# EAGLE board RH007.1 (EAGLE 7.1.0)
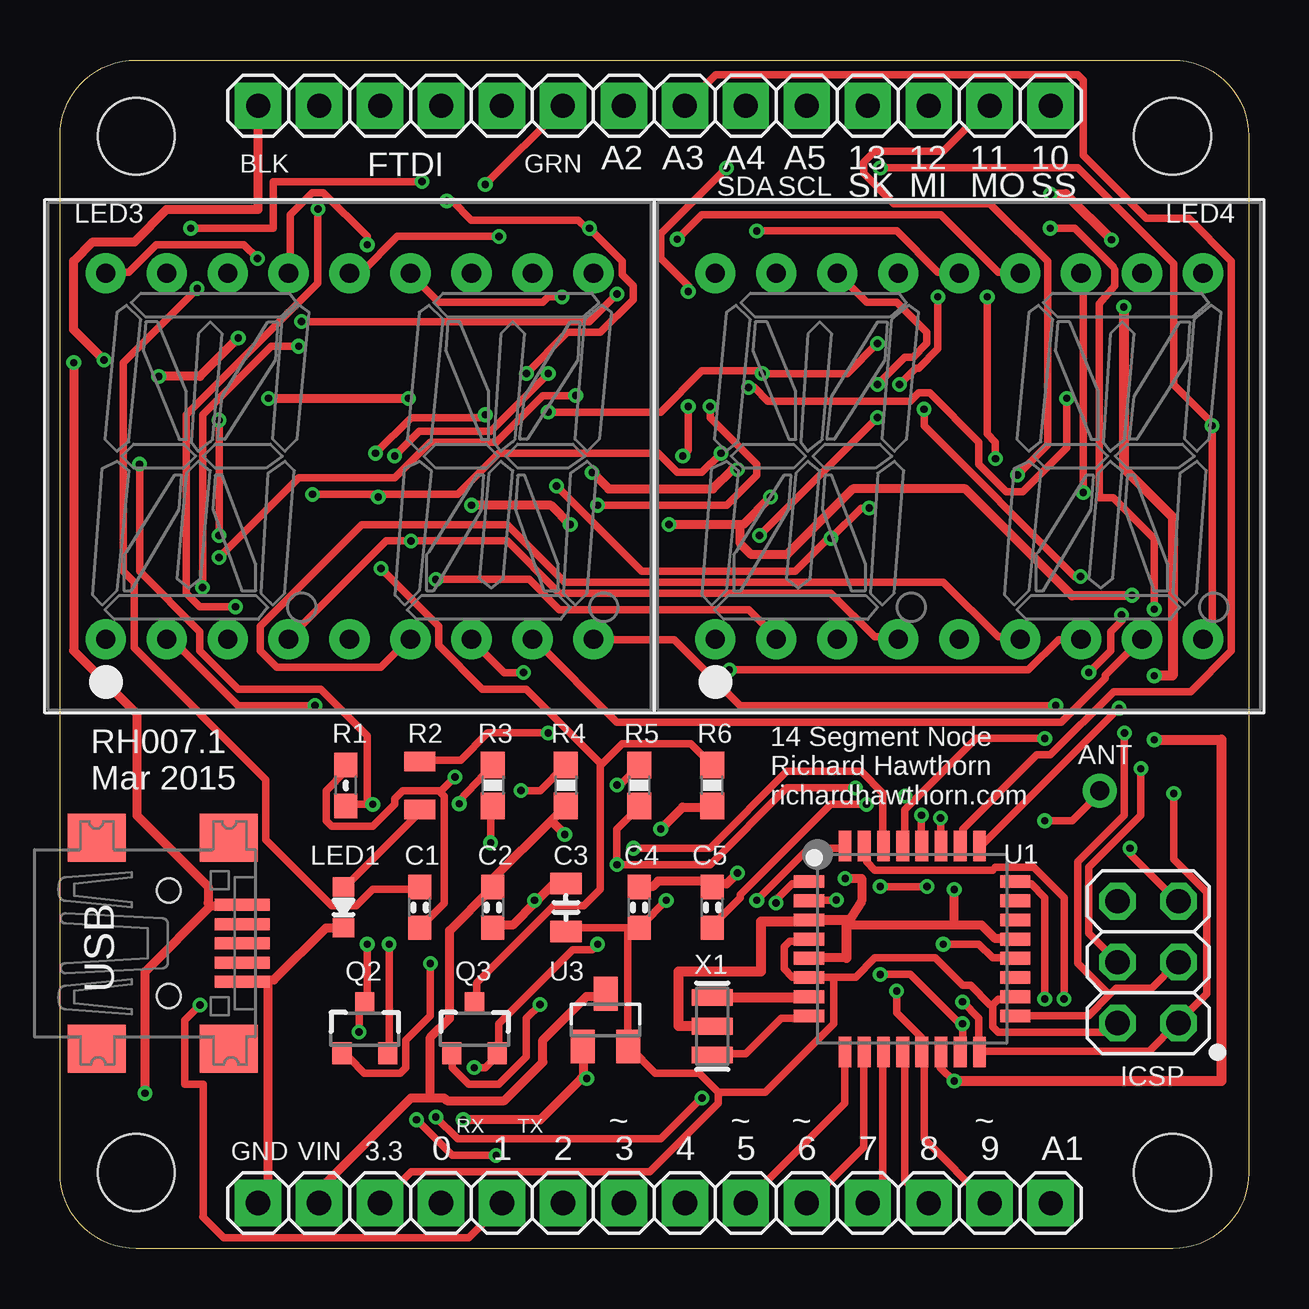
[diagram p0: board, top side]
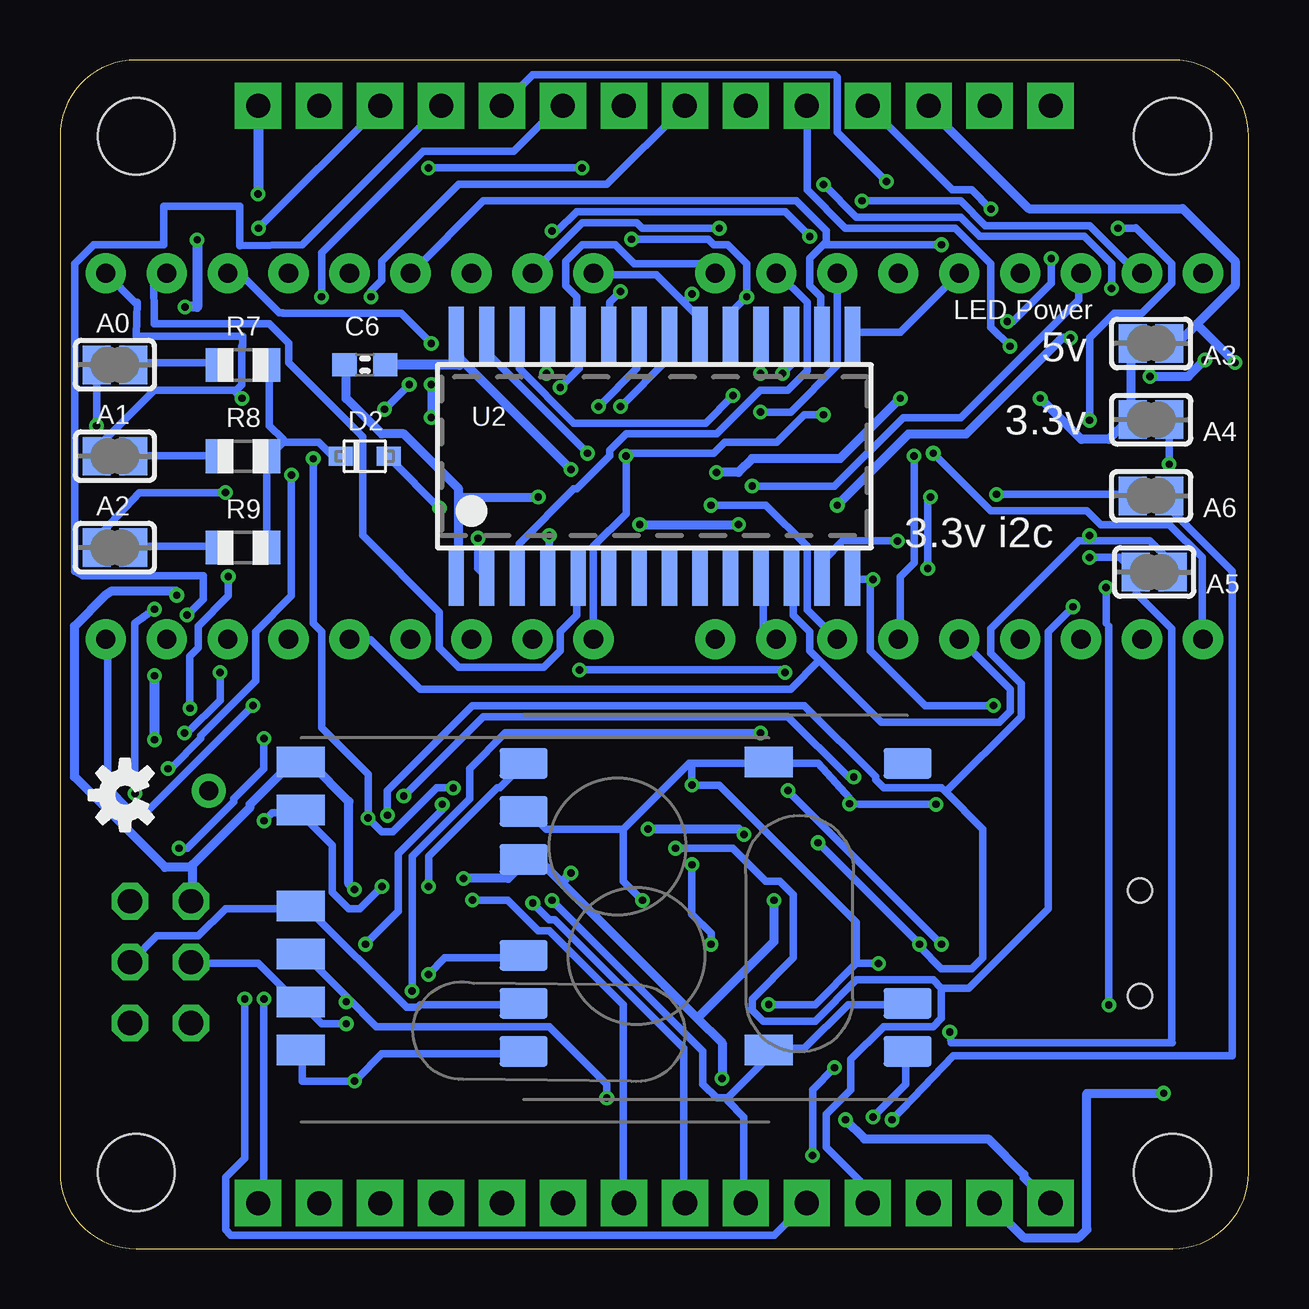
[diagram p1: board, bottom side, seen from below]

Size 49.53 x 49.53 mm. Coordinates in mm from the lower left corner, seen from the top.
Outline: 0,3.17 0,46.35 arc-90 3.17,49.53 46.35,49.53 arc-90 49.53,46.35 49.53,3.17 arc-90 46.35,0 3.17,0 arc-90 0,3.17
Copper layers (1*16): Top 0.035mm / dielectric 1.5mm / Bottom 0.035mm
Design rules "ITEADstudio_DRC *": minimum track width 12mil, minimum drill 12mil, track to track 6mil, track to pad 6mil, pad to pad 6mil, via to via 6mil, smd to smd 0mil, copper to edge 10mil, drill to drill 10mil, minimum pad ring 10mil, minimum via ring 6mil, stop-mask expansion 2mil, vias tented up to drill 100mil, thermal gap 15mil
Net classes: 1 power: width 0.381 mm, clearance 0.254 mm
Holes 3.2 mm at 3.17,3.17 46.35,3.17 3.17,46.35 46.35,46.35
tKeepout: area 0,0 to 5.7,5.7; area 43.8,0 to 49.5,5.7; area 43.8,43.8 to 49.5,49.5; area 0,43.8 to 5.7,49.5
bKeepout: area 0,43.8 to 5.7,49.5; area 43.8,43.8 to 49.5,49.5; area 43.8,0 to 49.5,5.7; area 0,0 to 5.7,5.7
tRestrict: area 24.3,8.9 to 29.1,12.8; area 5.8,16.9 to 6.9,18.5; area 5.2,9.7 to 6.7,10.4
bRestrict: area 27.4,17.7 to 29.2,18.7; area 21.1,13.8 to 22.9,14.9; area 21.6,12.6 to 22.1,13.2; area 20.7,12.6 to 21.2,13.2; area 20.2,12.8 to 20.7,13.5; area 20.1,13.4 to 20.6,14; area 26.5,18.9 to 27.1,19.5; area 26.5,17.9 to 27.1,18.5; area 27.5,19.1 to 28,19.8; area 27.9,18.8 to 29.1,19.6

## Footprints (pad centres in the part's own frame; a part is rotated, then mirrored left to right if it is on the bottom)
SOLDERJUMPER_REFLOW_NOPASTE = smd 1.168 x 1.6: 1 -0.762,0; 2 0.762,0
0603-CAP = smd 1.016 x 0.965: 1 -0.85,0; 2 0.85,0
0805-CAP = smd 0.902 x 1.3: 1 -1,0; 2 1,0
USB-MINIB = smd 0.5 x 2.308: D+ 0,4.064; D- -0.8,4.064; GND 1.6,4.064; ID 0.8,4.064; VBUS -1.6,4.064 | smd 2 x 2.4: GND1 -4.4,-2; GND2 -4.4,3.5; GND3 4.4,3.5; GND4 4.4,-2 | hole 1: -2.2,1; 2.2,1
1X06 = drill 1 pad 1.93 square: 1 -6.35,0; 2 -3.81,0; 3 -1.27,0; 4 1.27,0; 5 3.81,0; 6 6.35,0
SOD-323F = smd 1 x 0.8: A -1,0; C 1,0
2X03 = drill 1.016 octagon: 1 -2.54,-1.27; 2 -2.54,1.27; 3 0,-1.27; 4 0,1.27; 5 2.54,-1.27; 6 2.54,1.27
1X14 = drill 1 pad 1.93 square: 1 -16.51,0; 2 -13.97,0; 3 -11.43,0 | drill 1.016 pad 1.93 square: 4 -8.89,0; 5 -6.35,0; 6 -3.81,0; 7 -1.27,0; 8 1.27,0; 9 3.81,0; 10 6.35,0; 11 8.89,0; 12 11.43,0; 13 13.97,0; 14 16.51,0
1X08 = drill 1 pad 1.93 square: 1 -8.89,0; 2 -6.35,0; 3 -3.81,0; 4 -1.27,0; 5 1.27,0; 6 3.81,0; 7 6.35,0; 8 8.89,0
0603-LED = smd 0.8 x 0.9: MINUS -0.85,0; PLUS 0.85,0
SEGMENT_STARTBUST_DUAL_KWA-541CBB = drill 0.8 pad 1.676: 1 -10.16,-7.62; 2 -7.62,-7.62; 3 -5.08,-7.62; 4 -2.54,-7.62; 5 0,-7.62; 6 2.54,-7.62; 7 5.08,-7.62; 8 7.62,-7.62; 9 10.16,-7.62; 10 10.16,7.62; 11 7.62,7.62; 12 5.08,7.62; 13 2.54,7.62; 14 0,7.62; 15 -2.54,7.62; 16 -5.08,7.62; 17 -7.62,7.62; 18 -10.16,7.62
SOT23-3 = smd 0.8 x 0.9: 1 -0.95,-1; 2 0.95,-1; 3 0,1.1
0603-RES = smd 1.016 x 0.965: 1 -0.85,0; 2 0.85,0
0805 = smd 0.8 x 1.3: 1 -1,0; 2 1,0
0603-RES' = smd 1.1 x 1: 1 -0.85,0; 2 0.85,0
R0805 = smd 1.1 x 1.4: 1 -1,0; 2 1,0
RFM12B-MINPADS = smd 2 x 1.27: ANT 8,-6; GND 8,-2; IRQ -8,4; SCK 8,4; SDI 8,2; SDI1 -8.002,-6.001; SDO -8,6; SEL 8,6; VDD 8,-4
RFM69W-MINPADS = smd 2 x 1.27: ANA 8,-5; DIO0 -11.5,5; GND 8,-7; MISO 8,1; MOSI 8,3; NSS 8,5; SCK 8,-1; VDD -11.5,-7
TQFP32-08 = smd 1.27 x 0.533: 1 -4.293,2.8; 2 -4.293,2; 3 -4.293,1.2; 4 -4.293,0.4; 5 -4.293,-0.4; 6 -4.293,-1.2; 7 -4.293,-2; 8 -4.293,-2.8; 17 4.293,-2.8; 18 4.293,-2; 19 4.293,-1.2; 20 4.293,-0.4; 21 4.293,0.4; 22 4.293,1.2; 23 4.293,2; 24 4.293,2.8 | smd 0.533 x 1.27: 9 -2.8,-4.293; 10 -2,-4.293; 11 -1.2,-4.293; 12 -0.4,-4.293; 13 0.4,-4.293; 14 1.2,-4.293; 15 2,-4.293; 16 2.8,-4.293; 25 2.8,4.293; 26 2,4.293; 27 1.2,4.293; 28 0.4,4.293; 29 -0.4,4.293; 30 -1.2,4.293; 31 -2,4.293; 32 -2.8,4.293
SOP28_300MIL = smd 0.635 x 2.286: P$1 -8.255,-5.08; P$2 -6.985,-5.08; P$3 -5.715,-5.08; P$4 -4.445,-5.08; P$5 -3.175,-5.08; P$6 -1.905,-5.08; P$7 -0.635,-5.08; P$8 0.635,-5.08; P$9 1.905,-5.08; P$10 3.175,-5.08; P$11 4.445,-5.08; P$12 5.715,-5.08; P$13 6.985,-5.08; P$14 8.255,-5.08; P$15 8.255,5.08; P$16 6.985,5.08; P$17 5.715,5.08; P$18 4.445,5.08; P$19 3.175,5.08; P$20 1.905,5.08; P$21 0.635,5.08; P$22 -0.635,5.08; P$23 -1.905,5.08; P$24 -3.175,5.08; P$25 -4.445,5.08; P$26 -5.715,5.08; P$27 -6.985,5.08; P$28 -8.255,5.08
SOT23 = smd 1 x 1.4: 1 -0.95,-1.1; 2 0.95,-1.1; 3 0,1.1
RFM12B-ANTENNA = drill 0.8 pad 1.422: P$1 0,0
RESONATOR-SMD = smd 0.7 x 1.7: 1 -1.2,0; 2 0,0; 3 1.2,0

## Placement (x,y rotation side)
A0  [SOLDERJUMPER_REFLOW_NOPASTE]  47.24,36.83 180 bottom
A1  [SOLDERJUMPER_REFLOW_NOPASTE]  47.24,33.02 180 bottom
A2  [SOLDERJUMPER_REFLOW_NOPASTE]  47.24,29.21 180 bottom
A3  5V  [SOLDERJUMPER_REFLOW_NOPASTE]  4.06,37.72 0 bottom
A4  3.3V  [SOLDERJUMPER_REFLOW_NOPASTE]  4.06,34.54 0 bottom
A5  SCL  [SOLDERJUMPER_REFLOW_NOPASTE]  3.94,28.19 0 bottom
A6  SDA  [SOLDERJUMPER_REFLOW_NOPASTE]  4.06,31.37 0 bottom
C1  0.1  [0603-CAP]  14.99,14.22 90 top
C2  1u  [0603-CAP]  18.03,14.22 270 top
C3  10u  [0805-CAP]  21.08,14.22 90 top
C4  0.1  [0603-CAP]  24.13,14.22 90 top
C5  0.1  [0603-CAP]  27.18,14.22 90 top
C6  0.1  [0603-CAP]  36.83,36.83 180 bottom
CN1  USB  [USB-MINIB]  3.53,12.73 270 top
CN4  FTDI  [1X06]  14.61,47.62 0 top
D2  1N4148  [SOD-323F]  36.83,33.02 180 bottom
ICSP1  ICSP  [2X03]  45.34,11.94 90 top
JP3  [1X14]  24.77,1.91 180 top
JP5  [1X08]  32.38,47.62 0 top
LED1  LED0603  [0603-LED]  11.81,14.22 90 top
LED3  [SEGMENT_STARTBUST_DUAL_KWA-541CBB]  12.06,33.02 0 top
LED4  [SEGMENT_STARTBUST_DUAL_KWA-541CBB]  37.47,33.02 0 top
Q2  BSS138  [SOT23-3]  12.7,9.14 0 top
Q3  BSS138  [SOT23-3]  17.27,9.14 0 top
R1  10k  [0603-RES]  11.91,19.3 90 top
R2  1k5  [0805]  14.99,19.3 90 top
R3  10K  [0603-RES']  18.03,19.3 270 top
R4  10K  [0603-RES']  21.08,19.3 90 top
R5  10K  [0603-RES']  24.13,19.3 270 top
R6  10K  [0603-RES']  27.18,19.3 90 top
R7  47K  [R0805]  41.91,36.83 180 bottom
R8  47K  [R0805]  41.91,33.02 180 bottom
R9  47K  [R0805]  41.91,29.21 180 bottom
RF1  RFM12B  [RFM12B-MINPADS]  22.21,14.22 180 bottom
RF2  RFM69  [RFM69W-MINPADS]  31.5,13.28 180 bottom
U1  ATMega-328  [TQFP32-08]  35.51,12.5 0 top
U2  [SOP28_300MIL]  24.77,33.02 0 bottom
U3  MCP1703CB  [SOT23]  22.73,9.53 0 top
U$1  RFM12B_ANTENNA  [RFM12B-ANTENNA]  43.33,19.08 0 top
U$3  [OSHW-LOGO-S]  46.82,18.9 90 bottom
X1  16 MHz  [RESONATOR-SMD]  27.18,9.27 270 top

## Library data of the parts
A0 A1-A6 LED3 LED4 U2 = microbuilder
C1-C6 CN1 LED1 R1 R2 RF1 RF2 U1 U$1 = LowPowerLab
CN4 ICSP1 JP3 JP5 = pinhead
D2 R7-R9 = adafruit
Q2 Q3 R3-R6 X1 = SparkFun
U3 = linear
U$3 = SparkFun-Aesthetics

## Nets
3.3V: A4.2 C3.1 C4.1 ICSP1.2 JP3.12 Q2.1 Q3.1 R1.1 R3.1 R5.1 RF1.VDD RF2.VDD U1.4 U1.6 U1.18 U3.2
A0: U1.23
A1: JP3.1 U1.24
A2: JP5.1 U1.25
A3: JP5.2 U1.26
A4_SDA: A6.2 JP5.3 Q3.2 R5.2 U1.27
A5_SCL: A5.2 JP5.4 Q2.2 R3.2 U1.28
A6: U1.19
A7: U1.22
ADD0: A0.2 LED3.9 LED4.9 U2.P$23
ADD1: A1.2 LED3.10 LED4.10 U2.P$24
ADD2: A2.2 LED3.12 LED4.12 U2.P$25
AREF: C5.1 U1.20
COM: D2.A LED3.16 U2.P$2
COM1: LED3.11 U2.P$3
COM2: LED4.16 U2.P$4
COM3: LED4.11 U2.P$5
D0_RX: CN4.4 JP3.11 U1.30
D1_TX: CN4.5 JP3.10 U1.31
D2: JP3.9 RF1.IRQ RF2.DIO0 U1.32
D3: JP3.8 U1.1
D4: JP3.7 U1.2
D5: JP3.6 U1.9
D6: JP3.5 U1.10
D7: JP3.4 U1.11
D8: JP3.3 U1.12
D9: JP3.2 R2.2 U1.13
D10_SS: JP5.8 RF1.SEL RF2.NSS U1.14
D11_MOSI: ICSP1.4 JP5.7 RF1.SDI RF2.MOSI U1.15
D12_MISO: ICSP1.1 JP5.6 RF1.SDO RF2.MISO U1.16
D13_SCK: ICSP1.3 JP5.5 RF1.SCK RF2.SCK U1.17
GND [power]: C2.2 C3.2 C4.2 C5.2 C6.2 CN1.GND CN4.1 ICSP1.6 JP3.14 LED1.MINUS RF1.GND RF2.GND U1.3 U1.5 U1.21 U2.P$1 U3.1 X1.2
N$1: U1.7 X1.1
N$2: LED1.PLUS R2.1
N$3: RF1.ANT RF2.ANA U$1.P$1
N$5: A0.1 R7.2
N$17: D2.C R7.1 R8.1 R9.1
N$18: A2.1 R9.2
N$19: A1.1 R8.2
N$20: C1.2 CN4.6
N$21: U1.8 X1.3
N$22: LED3.7 LED4.7 U2.P$22
N$23: LED3.1 LED4.1 U2.P$21
N$24: LED3.18 LED4.18 U2.P$20
N$25: LED3.13 LED4.13 U2.P$19
N$26: LED3.6 LED4.6 U2.P$18
N$29: LED3.17 LED4.17 U2.P$17
N$30: LED3.15 LED4.15 U2.P$16
N$31: LED3.14 LED4.14 U2.P$15
N$32: LED3.2 LED4.2 U2.P$14
N$33: LED3.4 LED4.4 U2.P$13
N$34: LED3.5 LED4.5 U2.P$12
N$35: LED3.8 LED4.8 U2.P$11
RST: C1.1 ICSP1.5 R1.2 U1.29
SCL: A5.1 Q2.3 R4.2 U2.P$26
SDA: A6.1 Q3.3 R6.2 U2.P$27
VBUS [power]: A3.2 C2.1 CN1.VBUS CN4.3 JP3.13 R4.1 R6.1 U3.3
VLED [power]: A3.1 A4.1 C6.1 U2.P$28

## Tracks (layer width: path | path; a pad name or v marks a point on that pad's centre or on a via)
3.3V  (via drill 0.3)
  Top 0.305: R1.1 12,18.52 v13.03,18.52 12.8,18.63 12.8,21.37 10.86,23.32 7.43,23.32 5.83,24.92 5.83,25.72 3.31,28.23 v3.31,32.69 | U1.4 31.2,12.8 30.4,12.8 30.18,12.57 30.18,11.66 30.52,11.32 31.2,11.32 U1.6 31.32,11.32 32.23,11.32 | 38.86,10.17 39.09,10.4 39.78,10.4 U1.18 | 38.86,10.17 38.86,9.26 39.09,9.03 43.66,9.03 44.01,9.37 ICSP1.2 | 32.23,11.32 33.15,11.32 33.95,12.12 36.46,12.12 37.6,10.97 37.95,10.97 38.75,10.17 38.86,10.17 | C4.1 24.12,13.37 21.26,13.37 21.14,13.26 C3.1 | C4.1 23.66,13.26 23.66,8.46 U3.2 23.77,8.34 24.8,7.32 26.63,7.32 27.43,6.51 | JP3.12 14.63,3.2 24.57,3.2 27.43,6.06 27.43,6.51 | 32.23,11.32 32.23,9.37 29.38,6.51 27.43,6.51 | v25.26,14.52 24.23,13.49 C4.1 | v20,10.17 19.43,9.6 19.43,8 18.29,6.86 17.03,6.86 16.34,7.54 16.34,8.12 Q3.1 | v15.43,11.89 15.43,9.72 14.4,8.69 14.4,7.54 14.17,7.32 12.69,7.32 12.06,7.94 | 11.89,8.12 12.06,7.94 | v23.2,19.32 23.32,19.32 24.12,20.12 R5.1 | R3.1 16.64,18.67 v16.64,18.54 | 12.06,7.94 Q2.1
  Bottom 0.305: v13.03,18.52 16.23,18.52 v16.64,18.54 16.64,18.8 17.95,20.23 19.89,20.23 RF2.VDD | v3.31,32.69 3.31,34.52 A4.2 | 20,20.34 RF2.VDD | 26.06,17.49 29.26,17.49 29.95,18.17 30.18,18.17 RF1.VDD | 26.06,17.49 23.32,20.23 23.2,20.23 | 23.2,20.23 20.12,20.23 RF2.VDD | 26.06,17.49 26.06,15.32 v25.26,14.52 | v20,10.17 18.06,10.17 16.34,11.89 | v15.43,11.89 16.34,11.89 | 16.34,11.89 16.34,13.6 22.06,19.32 v23.2,19.32 23.2,20.23
A1  (via drill 0.3)
  Top 0.305: v41.03,10.4 41.03,14.63 40.46,15.2 39.89,15.2 U1.24
  Bottom 0.305: v41.03,10.4 41.03,2.17 41.26,1.94 JP3.1
A2  (via drill 0.3)
  Top 0.305: v44.12,22.52 38.41,16.8 U1.25 | v42.52,28 42.29,28 36.01,34.29 v36.01,34.98 | v34.98,36.01 35.66,36.69 35.78,36.69 36.58,37.49 v36.58,39.66
  Bottom 0.305: v44.12,22.52 44.12,24.69 43.78,25.03 43.78,25.95 42.52,27.2 v42.52,28 | v34.98,36.01 v36.01,34.98 | v36.58,39.66 36.58,39.89 36.12,40.35 36.12,41.15 32.92,44.35 26.75,44.35 23.55,47.55 JP5.1
A3
  Top 0.305: U1.26 37.6,16.8 37.6,17.49 40.69,20.57 41.26,20.57 43.9,23.22 47.1,23.22 48.81,24.92 48.81,41.15 47.03,42.93 45.26,42.93 42.63,45.55 42.63,48.69 42.41,48.92 27.32,48.92 26.06,47.66 JP5.2
A4_SDA  (via drill 0.3)
  Top 0.305: v22.4,12.69 22.17,12.46 21.37,12.46 18.29,9.37 18.29,8.23 Q3.2 18.17,8 17.72,7.54 v17.26,7.54 | R5.2 24.12,18.4 23.2,17.49 v23.2,16 27.09,16 30.29,19.2 v33.15,19.2 | v36.69,17.95 36.69,16.8 U1.27 | v14.86,5.37 16.34,3.89 v18.17,3.89 | v38.63,39.66 38.63,33.95 38.98,33.6 v38.98,32.92
  Bottom 0.305: v22.4,12.69 22.4,13.14 23.2,13.95 v23.2,16 | v33.15,19.2 33.83,19.2 35.66,17.37 36.12,17.37 v36.69,17.95 36.69,19.77 38.63,21.72 38.63,25.72 38.98,26.06 v38.98,32.92 | v14.86,5.37 12.32,8.04 0.69,8.04 0.69,28.23 3.2,30.75 3.2,31.32 A6.2 | v18.17,3.89 18.17,6.63 v17.26,7.54 | v38.63,39.66 38.63,41.49 34.4,45.72 30.63,45.72 28.8,47.55 28.57,47.55 JP5.3
A5_SCL  (via drill 0.3)
  Top 0.305: v13.72,12.69 13.72,8.23 Q2.2 | v17.95,16.92 17.95,18.4 R3.2 | v35.89,18.06 35.89,16.8 U1.28 | v15.09,44.46 8.91,44.46 8.89,44.45 8.89,42.52 v5.45,42.52 | v6.63,29.72 v6.63,34.52
  Bottom 0.305: v17.95,16.92 v13.72,12.69 13.72,12.57 12.8,11.66 11.54,11.66 11.09,12.12 11.09,17.49 12.63,19.03 | v35.89,18.06 35.89,19.09 32.35,22.63 18.52,22.63 15.54,19.66 15.54,19.55 15.2,19.2 12.8,19.2 12.63,19.03 | 6.63,29.49 7.09,29.49 10.74,25.83 10.74,24.8 9.49,23.55 9.49,22.17 12.63,19.03 | 6.63,29.49 4.12,29.49 3.2,28.57 3.2,28.23 A5.2 | v15.09,44.46 17.14,46.52 17.14,48.81 17.26,48.92 29.83,48.92 31.09,47.66 JP5.4 | v5.45,42.52 4.7,42.52 4.7,42.55 3.2,41.03 3.2,40.23 4.46,38.98 5.6,38.98 6.63,37.95 v6.63,34.52 | v6.63,29.72 6.63,29.49
ADD0  (via drill 0.3)
  Top 0.305: LED4.9 47.66,25.49 48.01,25.83 v48.01,34.29 48.01,34.4 46.41,36.01 46.41,41.03 42.41,45.03 v34.18,45.03 | v26.18,39.89 26.18,40.12 25.03,41.26 25.03,42.29 v27.77,45.03 | v41.49,22.63 28.35,22.63 25.6,25.38 22.29,25.38 LED3.9
  Bottom 0.305: v48.01,34.29 A0.2 | v26.18,39.89 26.63,39.43 26.63,38.18 U2.P$23 | v34.18,45.03 v27.77,45.03 | v41.49,22.63 45.83,18.29 46.63,18.29 47.55,19.2 47.55,25.38 LED4.9
ADD1  (via drill 0.3)
  Top 0.305: v28.69,35.89 28.92,35.89 29.49,35.32 35.43,35.32 35.78,35.66 36.23,35.66 38.29,33.6 38.29,32.69 39.43,31.55 40.12,31.55 41.95,33.38 v41.95,35.43
  Bottom 0.305: LED3.10 22.29,40.69 22.63,41.03 25.6,41.03 26.4,41.83 27.77,41.83 28.46,41.15 28.46,40.12 28,39.66 28,38.18 U2.P$24 27.89,37.95 27.89,36.69 v28.69,35.89 | A1.2 48.01,33.38 45.61,35.78 42.18,35.78 | 42.18,35.78 41.95,36.01 41.95,37.6 41.91,37.6 41.91,38.02 46.35,38.02 46.32,39.43 46.41,39.43 47.55,40.58 LED4.10 | v41.95,35.43 42.18,35.66 42.18,35.78
ADD2  (via drill 0.3)
  Top 0.305: v42.63,31.51 42.63,40.58 LED4.12 | v34.06,37.72 32.8,36.46 v29.26,36.46 29.26,36.58 26.75,36.58 25.03,34.86 v20.34,34.86
  Bottom 0.305: A2.2 48.01,29.6 46.23,31.51 v42.63,31.51 | v29.26,36.46 29.26,38.06 U2.P$25 | v34.06,37.72 35.32,38.98 40.26,38.98 40.26,38.99 40.39,38.99 41.91,40.51 41.91,40.58 42.52,40.58 LED4.12 | LED3.12 17.14,36.8 19.09,34.86 v20.34,34.86
AREF  (via drill 0.3)
  Top 0.305: v33.6,18.52 32.12,18.52 28.35,14.74 28.35,14.63 27.2,13.49 C5.1 | v36.8,12.69 38.29,12.69 38.86,12.12 39.78,12.12 U1.20
  Bottom 0.305: v33.6,18.52 33.6,18.29 35.43,16.46 35.43,14.06 v36.8,12.69
COM  (via drill 0.3)
  Top 0.305: v33.72,30.86 33.38,30.86 v32.12,29.6 32,29.6 30.63,28.23 24.23,28.23 v20.69,31.77
  Bottom 0.305: v33.72,30.86 35.78,32.92 D2.A | v32.12,29.6 32.12,28.35 31.77,28 U2.P$2 | v20.69,31.77 17.26,31.77 14.4,34.63 12,34.63 7.09,39.55 7.09,40.58 LED3.16
COM1
  Bottom 0.305: U2.P$3 30.4,28 30.4,29.38 28.12,31.66 28,31.66 26.63,33.03 26.63,33.26 25.95,33.95 22.17,33.95 20.34,35.78 19.2,35.78 18.4,36.58 18.4,39.43 19.66,40.69 LED3.11
COM2  (via drill 0.3)
  Top 0.305: v34.06,34.63 v29.15,29.72 | v34.06,36.01 35.2,37.15 35.55,37.15 36.12,37.72 36.12,38.18 34.86,39.43 33.6,39.43 32.46,40.58 LED4.16
  Bottom 0.305: v29.15,29.72 29.15,28 U2.P$4 | v34.06,36.01 v34.06,34.63
COM3
  Bottom 0.305: U2.P$5 28,27.89 28,26.4 28.69,25.72 28.69,24.92 29.38,24.23 32.92,24.23 33.72,25.03 33.72,26.52 36.92,29.72 36.92,33.83 40.01,36.92 40.01,37.72 40.8,38.53 45.61,38.53 45.63,40.58 45.03,40.58 LED4.11
D0_RX  (via drill 0.3)
  Top 0.305: v23.89,16.69 27.09,16.69 30.29,19.89 33.38,19.89 34.29,18.97 34.29,16.8 U1.30 | v10.74,43.32 10.74,40.23 5.26,34.75 5.26,27.32 5.83,26.75 v7.32,26.75
  Bottom 0.305: v23.89,16.69 21.49,16.69 20.12,15.32 19.55,15.32 18.97,14.74 18.97,12.12 20.69,10.4 20.69,9.94 20.23,9.49 18.06,9.49 16.34,11.2 13.14,11.2 12.8,10.86 | 12.8,10.86 12.8,9.6 13.14,9.26 15.2,9.26 16.57,7.89 16.57,6.63 17.6,5.6 17.6,4.23 15.89,2.52 15.89,1.94 JP3.11 | v10.74,43.32 11.54,44.12 12.34,44.12 15.77,47.55 CN4.4 | v7.32,26.75 8.34,25.72 8.34,14.17 11.66,10.86 12.8,10.86
D1_TX  (via drill 0.3)
  Top 0.305: v41.83,10.4 41.83,14.63 40.58,15.89 38.98,15.89 38.86,15.77 33.95,15.77 33.6,16.12 33.6,16.69 U1.31 | v9.94,37.6 8.8,37.6 5.94,34.75 v5.94,27.55 | v5.83,10.16 5.71,10.03 5.21,9.53 5.21,6.86 5.97,6.86 5.97,1.33 5.96,1.33 6.83,0.46 17.03,0.46 18.4,1.83 JP3.10
  Bottom 0.305: v41.83,10.4 41.83,3.77 42.63,2.97 42.63,0.8 42.41,0.57 19.77,0.57 18.52,1.83 JP3.10 | v9.94,37.6 10.74,38.41 10.74,41.03 12.23,42.52 16.8,42.52 18.4,44.12 18.4,47.55 CN4.5 | v5.94,27.55 5.94,26.06 5.83,25.95 v5.83,10.16
D2  (via drill 0.3)
  Top 0.305: v29.03,14.52 31.2,16.69 32.69,16.69 U1.32
  Bottom 0.305: v29.03,14.52 22.75,8.23 22.75,6.86 22.17,6.29 21.72,6.29 | 21.72,6.29 20,8 20,8.23 RF2.DIO0 19.89,8.34 18.52,8.34 16.69,10.17 14.29,10.17 RF1.IRQ | JP3.9 21.03,1.94 21.03,5.49 21.72,6.17 21.72,6.29
D3  (via drill 0.3)
  Top 0.305: v29.83,14.4 29.83,14.52 30.52,15.2 31.2,15.2 U1.1
  Bottom 0.305: v29.83,14.4 29.15,13.72 28.92,13.72 23.55,8.34 23.55,1.94 JP3.8
D4  (via drill 0.3)
  Top 0.305: v32.35,14.53 31.45,14.53 U1.2
  Bottom 0.305: v32.35,14.53 30.87,14.53 29.6,13.26 29.15,13.26 26.06,10.17 26.06,1.94 JP3.7
D5
  Top 0.305: U1.9 32.69,8.12 32.69,6.06 28.57,1.94 JP3.6
D6
  Top 0.305: U1.10 33.49,8.12 33.49,4.23 31.2,1.94 JP3.5
D7
  Top 0.305: U1.11 34.29,8.12 34.29,2.52 33.72,1.94 JP3.4
D8
  Top 0.305: U1.12 35.2,8.12 35.2,2.86 36.12,1.94 JP3.3
D9  (via drill 0.3)
  Top 0.305: JP3.2 38.63,1.94 36.01,4.57 36.01,8.12 U1.13 35.89,8.34 35.89,8.8 34.86,9.83 v34.86,10.74 | v20.34,21.49 17.83,21.49 16.69,20.34 15.09,20.34 R2.2
  Bottom 0.305: v20.34,21.49 30.98,21.49 32.46,20 32.46,18.75 34.86,16.34 v34.86,10.74
D10_SS  (via drill 0.3)
  Top 0.305: v37.26,6.99 36.68,7.54 36.8,8.12 U1.14
  Top 0.406: v41.27,43.94 41.91,43.94 v43.81,42.04 | v44.32,39.24 44.32,32.51 46.35,30.48 46.35,23.88 v45.59,23.88 | v45.59,21.21 48.39,21.21 48.39,6.99 v37.26,6.99
  Bottom 0.305: RF2.NSS 39.43,8.23 39.43,6.99 v37.26,6.99 37.15,7.09 36.12,8.12 30.29,8.12 RF1.SEL
  Bottom 0.406: JP5.8 v41.27,43.94 | v43.81,42.04 43.81,39.24 v44.32,39.24 | v45.59,23.88 v45.59,21.21
D11_MOSI  (via drill 0.3)
  Top 0.305: U1.15 37.6,8.23 v37.6,9.37 37.49,9.37 35.43,11.43 v34.18,11.43 | v39.89,32.23 41.15,33.49 41.15,41.15 38.75,43.55 34.75,43.55 33.49,44.81 33.49,45.26 33.95,45.72 36.8,45.72 38.63,47.55 JP5.7 | v45.03,20 45.03,18.06 42.86,15.89 42.86,13.14 ICSP1.4
  Bottom 0.305: v37.6,9.37 38.63,9.37 39.43,10.17 RF2.MOSI 39.55,10.17 41.26,11.89 44.01,11.89 ICSP1.4 | v34.18,11.43 33.49,12.12 30.29,12.12 RF1.SDI | v39.89,32.23 39.89,27.2 41.38,25.72 41.38,23.66 43.66,21.37 43.66,21.26 44.92,20 v45.03,20
D12_MISO  (via drill 0.3)
  Top 0.305: v15.66,5.49 16.57,4.57 25.03,4.57 v26.75,6.29 | v41.26,42.52 42.29,42.52 43.89,40.92 43.94,40.79 43.94,40.13 43.31,39.37 43.31,31.29 43.89,31.29 45.59,29.59 v45.59,26.64 | v46.41,18.97 46.41,16.23 47.78,14.86 47.78,10.63 46.63,9.49 ICSP1.1 46.52,9.37 45.38,8.23 38.41,8.23 U1.16 38.29,8.34 38.29,9.6 v37.6,10.29
  Bottom 0.305: v15.66,5.49 14.29,6.86 14.29,8.12 RF1.SDO | v26.75,6.29 26.75,6.86 29.15,9.26 36.35,9.26 37.55,10.46 | 37.55,10.46 39.43,12.34 RF2.MISO | v41.26,42.52 36.23,47.55 JP5.6 | v45.59,26.64 46.41,26.06 v46.41,18.97 | v37.6,10.29 37.6,10.4 37.55,10.46
D13_SCK  (via drill 0.3)
  Top 0.305: 43.72,10.57 44.01,10.86 45.49,10.86 46.52,11.89 ICSP1.3 | 43.72,10.57 42.86,9.72 39.89,9.72 U1.17 | v44.23,26.4 44.23,26.18 43.78,25.72 43.78,24.92 v42.86,24 | v44.35,21.49 44.35,18.06 42.41,16.12 42.41,11.89 43.72,10.57
  Bottom 0.305: RF1.SCK 30.29,10.17 34.52,10.17 34.63,10.06 35.09,10.06 39.2,14.17 39.43,14.17 RF2.SCK 39.55,14.17 42.63,14.17 43.78,13.03 45.49,13.03 46.52,12 ICSP1.3 | v44.23,26.4 43.56,27.05 43.56,28.04 48.59,28.04 48.92,28.23 48.92,41.03 48.12,41.83 45.21,41.83 45.21,43.43 42.04,43.43 42.04,41.78 39.43,41.83 33.72,47.55 JP5.5 | v42.86,24 42.86,22.86 44.23,21.49 v44.35,21.49
GND  (via drill 0.3)
  Top 0.381: v1.83,37.03 0.57,38.29 0.57,41.15 1.37,41.95 3.11,41.95 4.45,43.31 8.26,43.31 8.26,47.04 8.2,47.04 8.23,47.55 CN4.1 | v4.12,36.35 5.83,36.35 v7.43,37.95 | v17.14,30.98 20.46,30.98 v21.26,30.18 | 28.35,30.18 28.46,30.18 v29.6,31.32 | 28.35,30.18 v25.38,30.18 | LED1.MINUS 11.77,13.37 11.09,13.37 8.91,11.2 7.66,11.2 CN1.GND 8.69,11.09 8.69,2.29 8.34,1.94 JP3.14 | 32.75,13.49 32.78,12.12 32.77,12.12 31.32,12.12 U1.5 | 37.26,13.49 38.41,13.49 38.98,12.92 39.78,12.92 U1.21 | 37.26,13.49 32.75,13.49 | 19.83,14.46 20.57,15.2 21.03,15.2 C3.2 | 19.83,14.46 18.86,13.49 18.06,13.49 C2.2 | C4.2 24.23,15.09 24.69,15.09 24.92,15.32 26.86,15.32 27.09,15.09 C5.2 27.32,15.2 27.77,15.2 v28.23,15.66 | U3.1 21.83,8.34 21.83,7.2 v21.95,7.09 21.72,7.09 20,5.37 v16.8,5.37 | v19.77,14.52 19.83,14.46 | v32.72,15.43 33.4,15.43 33.4,14.48 32.75,13.49 | 37.26,13.49 v37.26,14.97 | 28.35,30.18 28.35,29.38 28.8,28.92 30.29,28.92 33.03,31.66 37.72,31.66 42.18,27.2 44.82,27.2 v44.67,27.23
  Top 0.406: X1.2 25.78,9.27 25.78,11.56 29.21,11.56 29.21,13.64 31.22,13.64 U1.3 32.77,13.7 32.77,12.12
  Bottom 0.381: 32.92,31.32 32.92,28 U2.P$1 | 32.92,31.32 32.92,31.66 35.2,33.95 36.12,33.95 37.6,35.43 37.6,36.8 C6.2 | v1.83,37.03 2.52,36.35 v4.12,36.35 | v7.43,37.95 7.77,37.95 11.77,33.95 14.17,33.95 v17.14,30.98 | v25.38,30.18 v21.26,30.18 | 32.92,31.32 v29.6,31.32 | 39.55,20.34 RF2.GND | 44.01,16 41.6,18.4 41.6,18.52 39.89,20.23 39.66,20.23 RF2.GND | 44.01,16 44.01,14.52 ICSP1.6 | v21.95,7.09 21.95,8.57 22.97,9.6 | 28.63,15.26 29.49,16.12 30.18,16.12 RF1.GND 30.29,16 30.86,15.43 v32.72,15.43 | 28.63,15.26 22.97,9.6 | 28.63,15.26 v28.23,15.66 | v19.77,14.52 19.77,12.8 22.97,9.6 | v37.26,14.97 37.49,15.2 37.49,18.63 39.09,20.23 39.32,20.23 RF2.GND | v16.8,5.37 16,4.57 10.86,4.57 9.37,3.09 9.37,2.97 8.34,1.94 JP3.14 | v44.67,27.23 44.7,27.23 44.7,27.41 47.37,27.41 47.64,27.23 48.92,25.95 48.92,19.66 45.15,15.89 44.12,15.89 44.01,16
N$1
  Top 0.406: X1.1 31.22,10.47 U1.7
N$2
  Top 0.305: LED1.PLUS 11.89,15.09 15.09,18.29 R2.1
N$3  (via drill 0.3)
  Top 0.305: v41.03,17.83 42.18,17.83 43.32,18.97 U$1.P$1 | v36.12,15.09 v34.18,15.09
  Bottom 0.305: v41.03,17.83 40.69,18.17 39.55,18.17 RF2.ANA 39.43,18.06 38.18,16.8 38.18,14.86 37.49,14.17 37.03,14.17 v36.12,15.09 | v34.18,15.09 34.18,16.34 31.32,19.2 31.2,19.2 30.29,20.12 RF1.ANT
N$5
  Bottom 0.305: R7.2 42.98,36.92 46.41,36.92 A0.1
N$17
  Bottom 0.305: 40.23,33.6 38.75,33.6 38.18,33.03 37.83,33.03 D2.C | 40.23,33.6 40.8,33.03 R8.1 40.92,32.92 40.92,29.26 R9.1 | R7.1 40.8,36.8 40.8,34.29 40.23,33.72 40.23,33.6
N$18
  Bottom 0.305: R9.2 42.98,29.26 46.41,29.26 A2.1
N$19
  Bottom 0.305: R8.2 42.98,33.03 46.41,33.03 A1.1
N$20  (via drill 0.3)
  Top 0.305: v5.71,40.01 2.63,36.92 2.63,28.23 3.09,27.77 3.09,25.03 8.57,19.55 8.57,17.03 11.32,14.29 12.34,14.29 13.03,14.97 14.97,14.97 C1.2 | v17.72,44.35 20.92,47.55 CN4.6
  Bottom 0.305: v5.71,40.01 5.71,41.03 6.86,42.18 11.2,42.18 12,42.98 16.34,42.98 v17.72,44.35
N$21
  Top 0.305: U1.8 31.2,9.6 30.06,9.6 28.57,8.12 27.2,8.12 X1.3
N$22  (via drill 0.3)
  Top 0.305: v27.09,35.09 27.09,34.63 29.03,32.69 29.03,32.23 27.77,30.98 v22.4,30.98 | v27.89,24.12 40.35,24.12 41.6,25.38 42.52,25.38 LED4.7 | v19.32,24 18.52,24 17.14,25.38 LED3.7
  Bottom 0.305: v27.09,35.09 25.49,36.69 25.49,38.06 U2.P$22 | v22.4,30.98 20.12,30.98 18.4,29.26 18.4,26.63 17.14,25.38 LED3.7 | v27.89,24.12 19.43,24.12 v19.32,24
N$23  (via drill 0.3)
  Top 0.305: v26.18,35.09 26.18,33.26 v25.95,33.03 | v13.14,33.15 14.63,34.63 17.6,34.63 v17.72,34.75
  Bottom 0.305: v26.18,35.09 24.23,37.03 24.23,38.06 U2.P$21 | LED4.1 27.32,25.49 27.32,29.26 25.95,30.63 v25.95,33.03 25.95,33.15 22.29,33.15 21.83,33.6 19.66,33.6 18.52,34.75 v17.72,34.75 | v13.14,33.15 10.74,30.75 6.74,30.75 6.17,30.18 3.31,30.18 1.94,28.8 1.94,25.49 LED3.1
N$24  (via drill 0.3)
  Top 0.305: v8.23,41.26 7.66,41.83 4,41.83 2.86,40.69 1.94,40.69 LED3.18 | v10.06,38.63 22.06,38.63 v23.2,39.78
  Bottom 0.305: U2.P$20 22.86,38.75 23.55,39.43 | 23.55,39.43 24.69,40.58 27.2,40.58 LED4.18 | v8.23,41.26 8.23,40.23 9.83,38.63 v10.06,38.63 | 23.55,39.43 v23.2,39.78
N$25  (via drill 0.3)
  Top 0.305: v20.92,39.66 20.34,39.66 20.12,39.43 15.77,39.43 14.63,40.58 LED3.13 | v25.72,42.06 26.75,43.09 36.69,43.09 39.09,40.69 40.01,40.69 LED4.13
  Bottom 0.305: U2.P$19 21.49,38.18 21.49,39.09 v20.92,39.66 20.92,41.03 21.72,41.83 22.29,41.83 22.52,42.06 v25.72,42.06
N$26  (via drill 0.3)
  Top 0.305: v20.34,36.46 17.95,34.06 14.97,34.06 v13.95,33.03 | LED4.6 40.01,25.49 39.09,25.49 36.8,27.77 21.03,27.77 18.63,30.18 12.57,30.18 8.34,25.95 8.34,24.92 9.03,24.23 13.37,24.23 14.52,25.38 LED3.6
  Bottom 0.305: v20.34,36.46 20.34,38.06 U2.P$18 | v13.95,33.03 13.95,28.57 14.52,28 14.52,25.49 LED3.6
N$29  (via drill 0.3)
  Top 0.305: v19.43,36.46 21.14,38.18 22.52,38.18 23.89,39.55 23.89,40.12 23.43,40.58 23.43,41.15 v22.06,42.52 21.95,42.52 21.6,42.86 17.14,42.86 16.34,43.66 v16.12,43.66
  Bottom 0.305: v19.43,36.46 19.09,36.8 19.09,38.06 U2.P$17 | v22.06,42.52 25.26,42.52 25.49,42.75 27.77,42.75 29.83,40.69 LED4.17 | v16.12,43.66 12,43.66 10.97,42.63 6.63,42.63 4.69,40.69 4.46,40.69 LED3.17
N$30  (via drill 0.3)
  Top 0.305: v12.8,41.83 12.8,42.18 10.97,44.01 10.52,44.01 9.6,43.09 9.6,40.69 LED3.15
  Bottom 0.305: 17.66,41.89 17.6,41.95 17.6,42.41 18.86,43.66 31.89,43.66 34.86,40.69 LED4.15 | 17.66,41.89 18.29,41.26 18.29,40.12 17.83,39.66 17.83,38.18 U2.P$16 | v12.8,41.83 17.6,41.83 17.66,41.89
N$31  (via drill 0.3)
  Top 0.305: v29.03,42.41 34.86,42.41 36.58,40.69 37.38,40.69 LED4.14 | v18.29,42.18 14.06,42.18 12.57,40.69 12.12,40.69 LED3.14
  Bottom 0.305: U2.P$15 16.46,38.18 14.52,38.18 12.12,40.58 LED3.14 | v29.03,42.41 28.8,42.41 28,43.2 19.32,43.2 v18.29,42.18
N$32  (via drill 0.3)
  Top 0.305: v15.66,27.89 19.55,27.89 20.8,26.63 28.69,26.63 29.83,25.49 LED4.2 | v10.63,22.63 7.43,22.63 4.69,25.38 4.46,25.38 LED3.2
  Bottom 0.305: U2.P$14 16.46,27.89 v15.66,27.89 15.77,27.77 15.77,24.92 13.49,22.63 v10.63,22.63
N$33  (via drill 0.3)
  Top 0.305: LED3.4 9.6,25.49 13.6,29.49 v14.63,29.49 18.63,29.49 20.8,27.32 32.12,27.32 33.95,25.49 34.86,25.49 LED4.4
  Bottom 0.305: v14.63,29.49 16.92,29.49 17.72,28.69 17.72,28 U2.P$13
N$34
  Bottom 0.305: 17.89,24.52 15.32,21.95 10.4,21.95 9.94,22.4 9.94,23.32 12,25.38 LED3.5 | 17.89,24.52 18.29,24.92 18.29,25.72 18.97,26.4 18.97,27.89 U2.P$12 | 17.89,24.52 19.09,23.32 34.52,23.32 36.58,25.38 37.38,25.38 LED4.5
N$35
  Top 0.305: LED4.8 45.03,25.38 43.55,23.89 43.55,23.77 41.72,21.95 23.2,21.95 19.77,25.38 LED3.8
  Bottom 0.305: LED3.8 20.23,25.95 20.23,27.89 U2.P$11
RST  (via drill 0.3)
  Top 0.305: 15.77,19.09 14.29,19.09 13.95,18.75 13.95,18.52 13.03,17.6 11.32,17.6 11.09,17.83 11.09,19.09 11.89,19.89 11.89,20.12 R1.2 | 15.77,19.09 16,18.86 16,14.4 15.09,13.49 C1.1 | 35.49,18.57 38.18,21.26 v41.03,21.26 | 35.49,18.57 35.2,18.29 35.2,16.8 U1.29 | v44.58,16.69 44.58,16.46 46.52,14.52 ICSP1.5 | v16.46,19.66 15.89,19.09 15.77,19.09 | 35.49,18.57 v35.2,18.86
  Bottom 0.305: v41.03,21.26 41.03,20 42.29,18.75 42.29,18.63 44.23,16.69 v44.58,16.69 | v16.46,19.66 16.69,19.66 19.2,22.17 31.89,22.17 v35.2,18.86
SCL  (via drill 0.3)
  Top 0.305: v12.8,12.69 12.8,10.29 Q2.3 12.57,10.17 12.46,10.06 v12.46,9.03 | v19.2,19.09 20,19.09 21.03,20.12 R4.2 | v21.49,35.55 20.12,35.55 18.17,33.6 15.43,33.6 13.95,32.12 9.94,32.12 v6.63,28.8
  Bottom 0.305: v19.2,19.09 v12.8,12.69 | v12.46,9.03 12.39,8.59 3.19,8.59 3.2,8.57 3.2,25.83 4.69,27.32 4.69,28.12 A5.1 4.8,28.23 5.37,28.8 v6.63,28.8 | v21.49,35.55 22.63,34.4 28.12,34.4 30.4,36.69 30.4,38.06 U2.P$26
SDA  (via drill 0.3)
  Top 0.305: 22.52,20.12 22.52,14.97 21.83,14.29 20.57,14.29 17.37,11.09 17.37,10.29 Q3.3 | 22.52,20.12 23.43,21.03 26.29,21.03 27.09,20.23 R6.2 | 13.26,31.43 16.57,31.43 18.29,33.15 24.92,33.15 25.72,32.35 26.75,32.35 v27.55,33.15 | 13.26,31.43 v10.52,31.43 | v13.37,28.35 15.77,25.95 15.77,25.15 17.6,23.32 19.43,23.32 22.52,20.23 22.52,20.12 | v13.26,31.32 13.26,31.43
  Bottom 0.305: v10.52,31.43 4.92,31.43 A6.1 | v27.55,33.15 31.66,37.26 31.66,38.06 U2.P$27 | v13.37,28.35 13.37,31.2 v13.26,31.32
VBUS  (via drill 0.3)
  Top 0.381: 20.46,17.83 21.03,18.4 R4.1 | 20.46,17.83 18.06,15.43 18.06,15.09 C2.1 17.95,14.97 16.23,13.26 16.23,9.6 15.43,8.8 15.43,6.29 | v25.03,17.49 25.95,18.4 27.09,18.4 R6.1 | 20.46,17.83 v21.03,17.26 | 15.43,6.29 14.63,6.29 10.86,2.52 10.86,1.94 JP3.13 | 15.43,6.29 16,6.29 16.12,6.17 18.52,6.17 20.12,7.77 20.12,8.69 21.95,10.52 22.63,10.52 U3.3 | 6.29,14.29 7.54,14.29 CN1.VBUS | 6.29,14.29 3.54,11.54 v3.54,6.48 | v0.57,36.92 0.57,24.92 3.2,22.29 3.2,18.06 6.17,15.09 6.17,14.4 6.29,14.29
  Bottom 0.381: v25.03,17.49 21.26,17.49 v21.03,17.26 | v3.54,6.48 6.74,6.48 6.74,0.8 7.09,0.46 9.37,0.46 10.74,1.83 JP3.13 | A3.2 2.97,37.72 2.17,38.52 | 2.17,38.52 0.57,40.12 0.57,41.15 2.76,43.33 9.16,43.33 13.37,47.55 | 2.17,38.52 v0.57,36.92
  Bottom 0.406: CN4.3 13.37,47.62 13.37,47.55
VLED  (via drill 0.3)
  Top 0.381: v28.23,32.46 28,32.46 27.2,31.66 22.86,31.66 v22.17,32.35 | v8.69,35.43 v14.52,35.43
  Bottom 0.381: A3.1 4.92,37.72 4.92,34.63 A4.1 5.03,34.52 5.83,33.72 6.97,33.72 v8.69,35.43 | v28.23,32.46 32.92,37.15 32.92,38.06 U2.P$28 | v22.17,32.35 21.26,32.35 20.69,32.92 17.03,32.92 v14.52,35.43
  Bottom 0.406: 32.92,37.15 32.89,37.15 32.89,36.83 C6.1

## Text on the board
tNames: FTDI | BLK | GRN | A2 | A3 | A4 | A5 | 13 | 12 | 11 | 10 | SDA | SCL | SK | MI | MO | SS | ANT | RH007.1 / Mar 2015 | 14 Segment Node / Richard Hawthorn / richardhawthorn.com | RX | TX | ~ | ~ | ~ | ~ | GND | VIN | 3.3 | 0 | 1 | 2 | 3 | 4 | 5 | 6 | 7 | 8 | 9 | A1
bNames: LED Power | 5v | 3.3v | 3.3v i2c
tDocu: REG